# EAGLE board Water_Monitor_Interface_v5 (EAGLE 9.6.2)
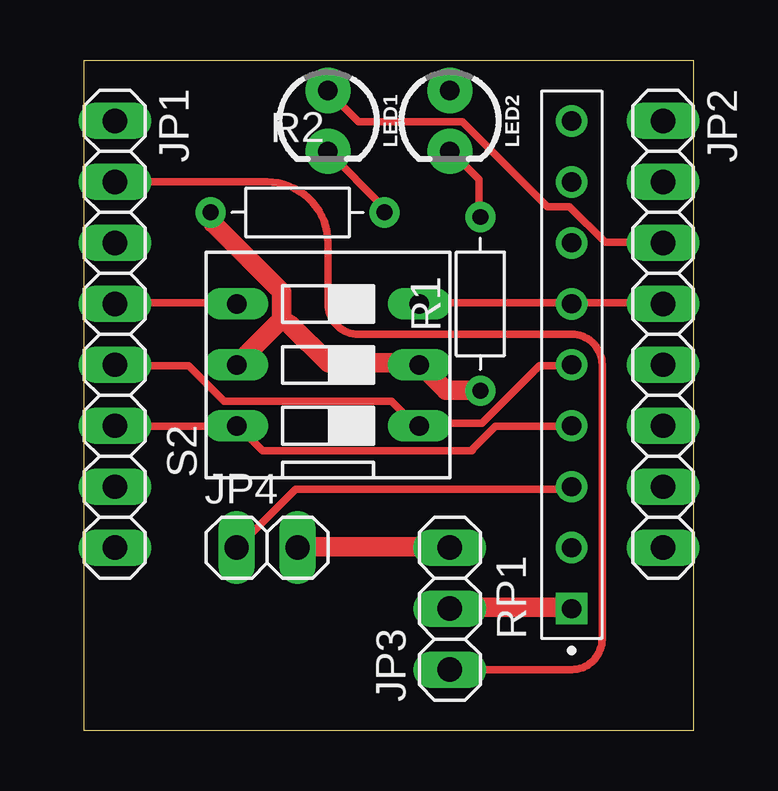
[diagram p0: board, top side]
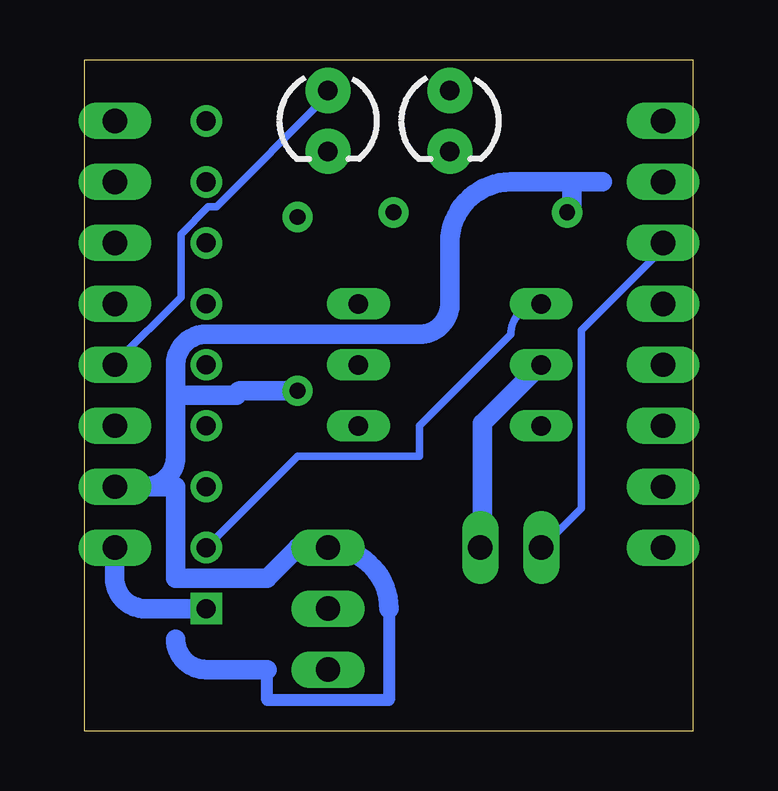
[diagram p1: board, bottom side, seen from below]

Size 25.4 x 27.94 mm. Coordinates in mm from the lower left corner, seen from the top.
Outline: 0,0 0,27.94 25.4,27.94 25.4,0 0,0
Copper layers (1*16): Top 0.035mm / dielectric 1.5mm / Bottom 0.035mm
Design rules "default": minimum track width 6mil, minimum drill 0.35mm, track to track 6mil, track to pad 6mil, pad to pad 6mil, via to via 6mil, smd to smd 6mil, copper to edge 40mil, drill to drill 6mil, minimum pad ring 10mil, minimum via ring 8mil, stop-mask expansion 4mil, vias tented up to drill 0mil, thermal gap 10mil
Net classes: 0 default: width 0.305 mm; 1 Ground: width 0.813 mm; 2 Power: width 0.813 mm

## Footprints (pad centres in the part's own frame; a part is rotated, then mirrored left to right if it is on the bottom)
1X08 = drill 1.016 long: 1 -8.89,0; 2 -6.35,0; 3 -3.81,0; 4 -1.27,0; 5 1.27,0; 6 3.81,0; 7 6.35,0; 8 8.89,0
1X03 = drill 1.016 long: 1 -2.54,0; 2 0,0; 3 2.54,0
1X02 = drill 1.016 long: 1 -1.27,0; 2 1.27,0
LED_3MM = drill 0.813 pad 1.88: A -1.27,0; K 1.27,0
RESAD724W46L381D178B = drill 0.66 pad 1.26: 1 -3.62,0; 2 3.62,0
4609X-101-103LF = drill 0.8 square: 1 0,0 | drill 0.8: 2 2.54,0; 3 5.08,0; 4 7.62,0; 5 10.16,0; 6 12.7,0; 7 15.24,0; 8 17.78,0; 9 20.32,0
DS-03 = drill 0.813 long: 1 -2.54,-3.81; 2 0,-3.81; 3 2.54,-3.81; 4 2.54,3.81; 5 0,3.81; 6 -2.54,3.81

## Placement (x,y rotation side)
JP1  PINHD-1X8  [1X08]  1.27,16.51 270 top
JP2  PINHD-1X8  [1X08]  24.13,16.51 270 top
JP3  PINHD-1X3  [1X03]  15.24,5.08 90 top
JP4  PINHD-1X2  [1X02]  7.62,7.62 0 top
LED1  Red  [LED_3MM]  10.16,25.4 270 top
LED2  Green  [LED_3MM]  15.24,25.4 270 top
R1  2.2K  [RESAD724W46L381D178B]  16.51,17.78 90 top
R2  2.2K  [RESAD724W46L381D178B]  8.89,21.59 0 top
RP1  4609X-101-103LF  [4609X-101-103LF]  20.32,5.08 90 top
S2  DS03  [DS-03]  10.16,15.24 90 top

## Library data of the parts
JP1-JP4 = Connector; CATEGORY: CONNECTOR; SUB-CATEGORY: PIN-HEADER
LED1 LED2 = SparkFun-LED; PROD_ID: DIO-08794
R1 R2 = Resistor; CATEGORY: Resistor; SUB-CATEGORY: Fixed
RP1 = Resistor Array; CREATED_BY: PCBLayout.com; DIGIKEY_PN: 4609X-101-103LF-ND; MANUFACTURER: Bourns Inc.; MPN: 4609X-101-103LF; PACKAGE: SIP-9
S2 = Switch; CATEGORY: SWITCH; MPN: MCNDS-03-V; TYPE: SPST

## Nets
+5V [Power]: JP2.8 JP3.2 RP1.1
AGND [Ground]: JP2.7 JP3.3 JP4.2 R1.1 R2.1 S2.2 S2.5
GREENLED: JP2.5 LED2.A
N$2: LED1.K R2.2
N$3: LED2.K R1.2
REDLED: JP2.3 LED1.A
SENSOR_IN: JP1.2 JP3.1
STOP_SWITCH: JP1.3 JP4.1 RP1.3
SW_1: JP1.5 RP1.5 S2.1
SW_2: JP1.4 RP1.2 S2.4
SW_4: JP2.4 RP1.6 S2.3
SW_8: JP1.6 RP1.4 S2.6

## Tracks (layer width: path | path; a pad name or v marks a point on that pad's centre or on a via)
+5V
  Top 0.813: RP1.1 20.23,5.14 15.32,5.14 JP3.2
  Bottom 0.813: RP1.1 22.86,5.08 arc90 24.13,6.35 JP2.8
AGND
  Top 0.813: JP4.2 8.91,7.66 15.2,7.66 JP3.3 | R1.1 16.46,14.17 15.09,14.17 14.06,15.2 S2.2 13.6,15.32 10.17,15.32 8.57,16.92 8.23,17.14 | 8.23,17.14 8.23,18.29 5.37,21.14 5.37,21.49 R2.1 | 8.23,17.14 6.4,15.32 S2.5
  Bottom 0.508: 12.7,5.08 12.7,1.27 16.51,1.27 17.78,1.27 17.78,2.54
  Bottom 0.813: JP4.2 8.8,7.66 8.8,12.8 6.4,15.2 S2.5 | R1.1 18.86,14.16 arc-90 19.05,13.97 21.59,13.97 | 21.59,13.97 21.59,11.43 | 21.59,11.43 arc90 22.86,10.16 | 5.08,21.78 arc90 R2.1 arc-90 5.08,21.78 | 5.08,22.86 3.81,22.86 | 5.08,21.78 5.08,22.86 | 21.59,13.97 21.59,15.24 arc90 20.32,16.51 11.43,16.51 arc-90 10.16,17.78 10.16,20.32 arc90 7.62,22.86 5.08,22.86 | JP2.7 22.86,10.16 | 21.59,11.43 arc90 22.86,10.16 | 22.86,10.16 21.59,10.16 21.59,6.35 17.78,6.35 16.51,7.62 JP3.3 arc90 12.7,5.08 | 17.78,2.54 20.32,2.54 arc90 21.59,3.81
GREENLED
  Bottom 0.305: JP2.5 24.12,15.32 21.37,18.06 21.37,20.69 20.23,21.83 19.89,21.83 15.32,26.4 15.32,26.63 LED2.A
N$2
  Top 0.305: LED1.K 12.46,21.83 12.46,21.6 R2.2
N$3
  Top 0.305: R1.2 16.46,21.49 16.46,22.97 15.32,24.12 LED2.K
REDLED
  Top 0.305: JP2.3 24.12,20.34 21.72,20.34 20.23,21.83 19.32,21.83 15.77,25.38 11.43,25.38 10.17,26.63 LED1.A
SENSOR_IN
  Top 0.305: JP1.2 3.81,22.86 7.62,22.86 arc-90 10.16,20.32 10.16,17.78 arc90 11.43,16.51 20.32,16.51 arc-90 21.59,15.24 21.59,3.81 arc-90 20.32,2.54 JP3.1
STOP_SWITCH
  Top 0.305: RP1.3 20.23,10.06 8.8,10.06 6.4,7.66 JP4.1
  Bottom 0.305: JP1.3 1.37,20.23 1.37,20 4.69,16.69 4.69,9.26 6.29,7.66 JP4.1
SW_1
  Top 0.305: RP1.5 20.23,15.2 18.97,15.2 16.57,12.8 14.06,12.8 S2.1 13.83,12.69 12.8,13.72 5.83,13.72 4.34,15.2 1.37,15.2 JP1.5
SW_2
  Top 0.305: JP1.4 1.37,17.83 6.29,17.83 S2.4
  Bottom 0.305: S2.4 arc-90 7.62,16.51 11.43,12.7 11.43,11.43 16.51,11.43 RP1.2
SW_4
  Top 0.305: JP2.4 24.12,17.83 20.34,17.83 RP1.6 20.23,17.83 14.06,17.83 S2.3
SW_8
  Top 0.305: 16.12,11.66 16.2,11.74 | 16.2,11.74 17.14,12.69 20.23,12.69 RP1.4 | JP1.6 1.37,12.69 6.29,12.69 S2.6 6.4,12.69 7.43,11.66 16.12,11.66 | 16.12,11.66 arc90 16.2,11.74